# Altium PCB PCB1.PcbDoc
Units mm, origin at the board's own origin, x right, y up, seen from the top; angles counter-clockwise.
Board outline 50.04 x 29.34 mm, 2 copper layers (Top Layer, Bottom Layer); 15 components, 14 nets, 73 pads, 4 vias.
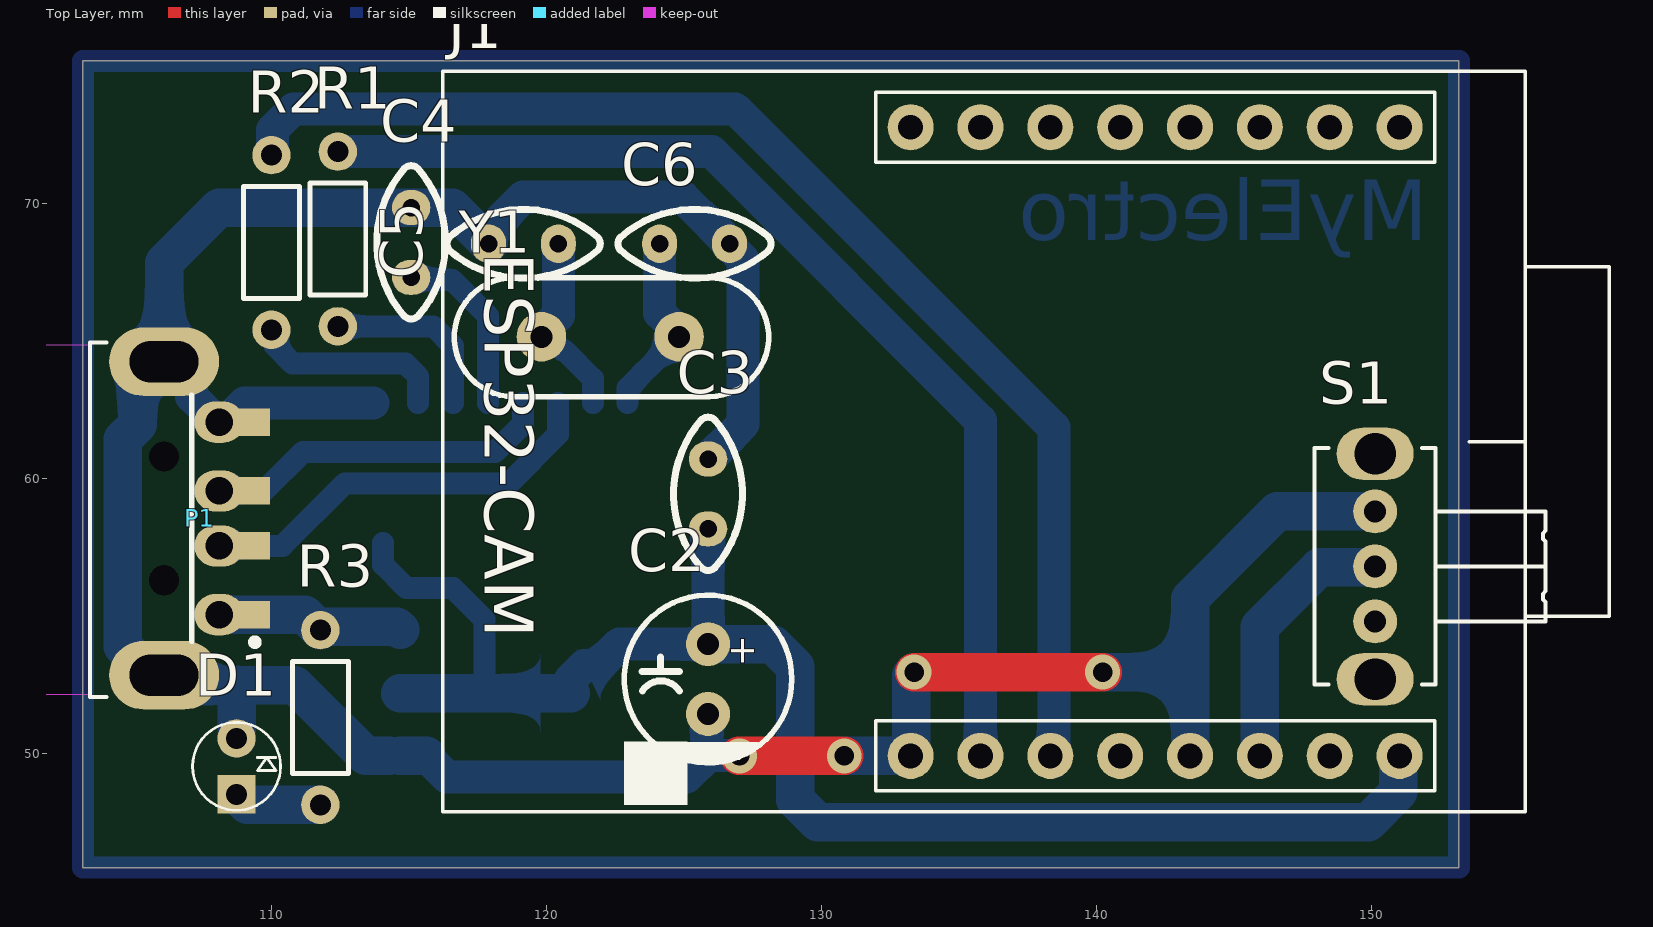
[diagram p0: Top Layer view]
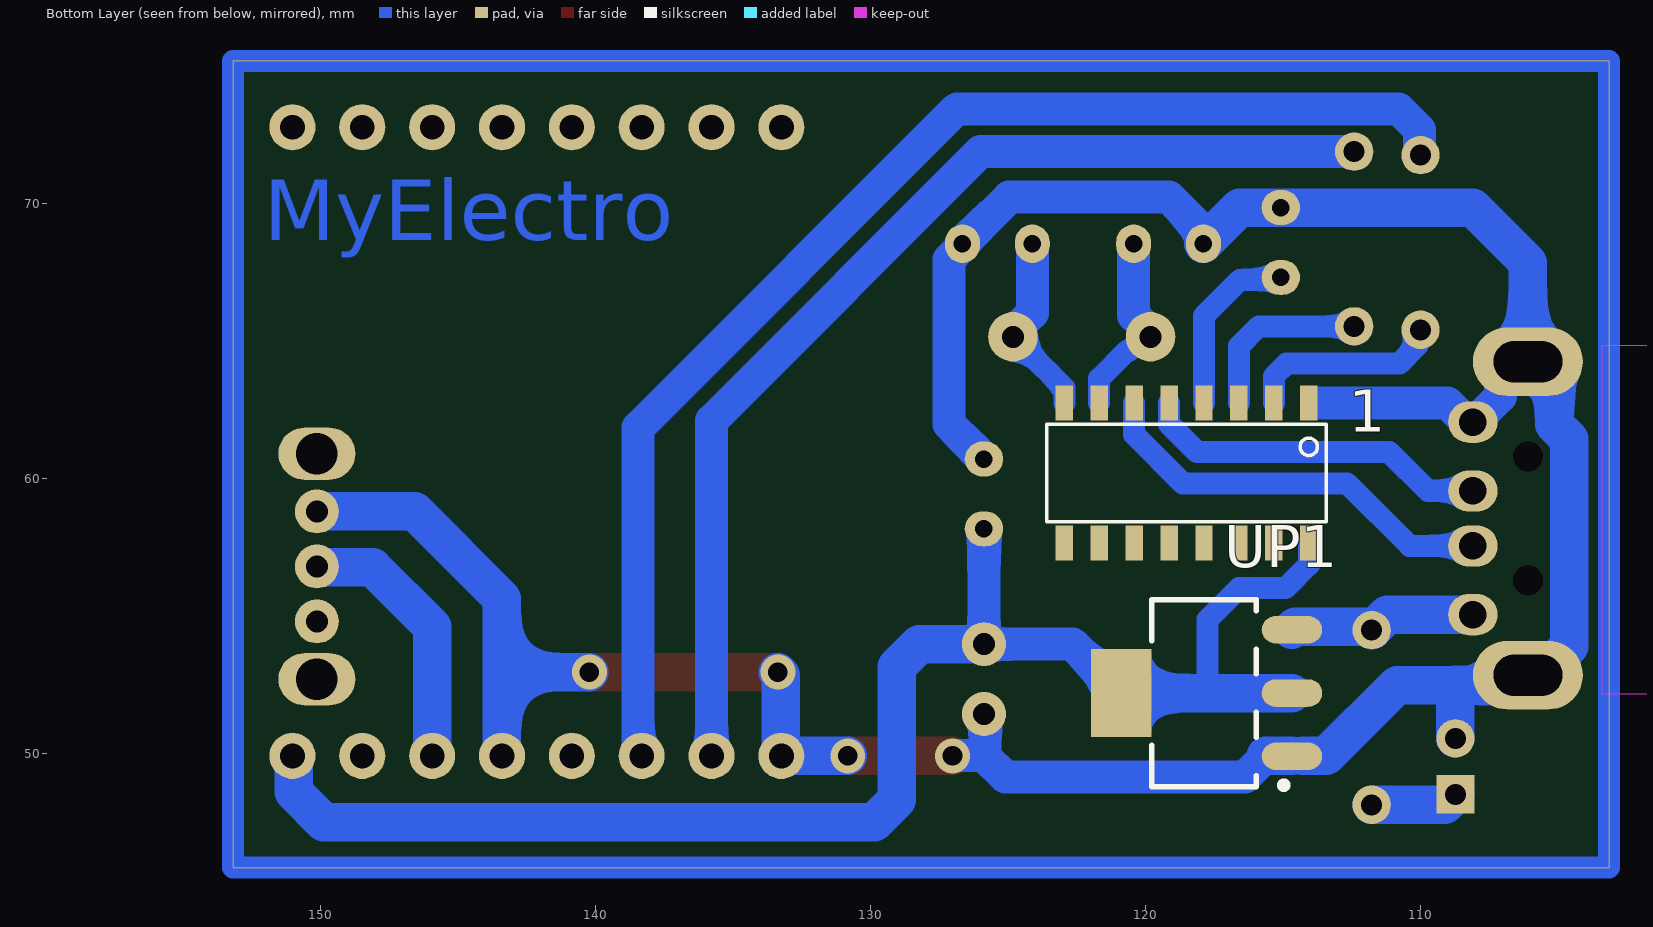
[diagram p1: Bottom Layer view, seen from below]
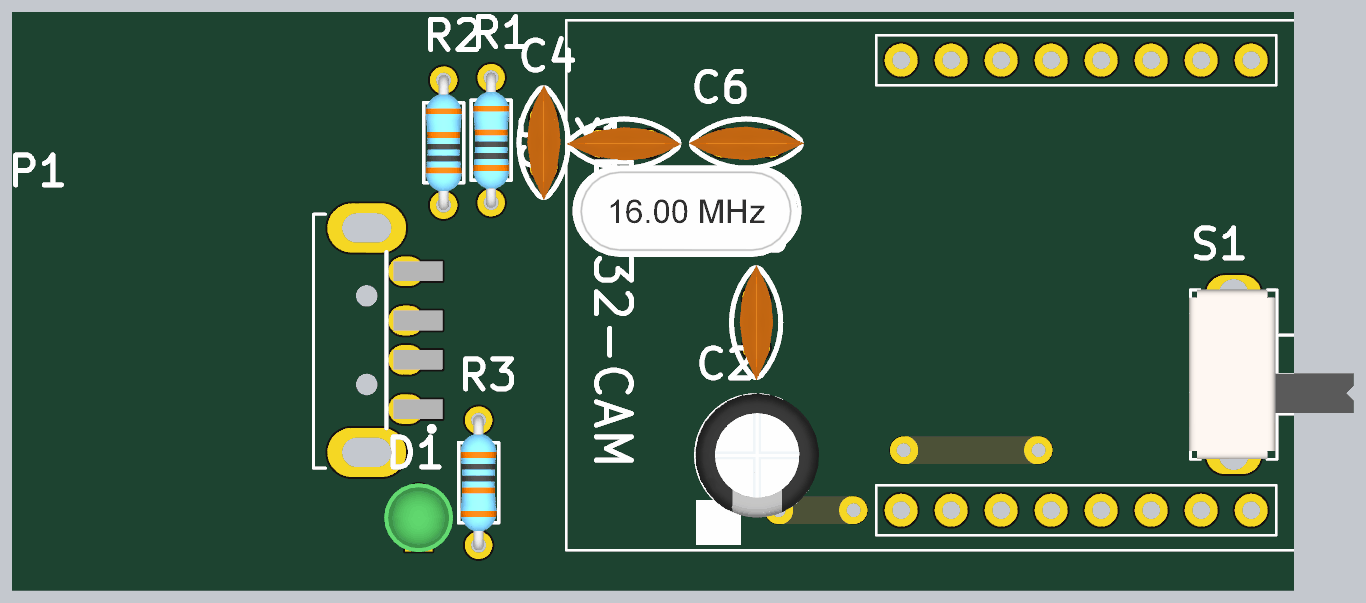
[diagram p2: 3D render of the assembled board from above, using the file's embedded part models]

## Layer stack, top to bottom
Top Solder: solder mask 0.0102, Solder Resist, Dk 3.5
Top Layer: signal copper 0.0356
Dielectric 1: dielectric 0.32, FR-4, Dk 4.8
Bottom Layer: signal copper 0.0356
Bottom Solder: solder mask 0.0102, Solder Resist, Dk 3.5

## Board outline
103.124,45.847 103.124,75.184 153.162,75.184 153.162,45.847

## Design rules (kind name [scope] priority, off if disabled: settings)
Clearance [All] p1: gap=0.254 ignorepadtopadclearanceinfootprint=FALSE except(0: Arc-Hole Track-Hole SMDPad-Hole THPad-Hole Via-Hole Fill-Hole Poly-Hole Region-Hole Text-Hole)
PolygonConnect [All] p1: connectstyle=Relief reliefconductorwidth=0.254 reliefentries=4 polygonreliefangle="90 Angle" airgapwidth=0.254
RoutingVias [All] p1: holewidth=0.711 width=1.27 viastyle="Through Hole" minholewidth=0.711 minwidth=1.27 maxholewidth=0.711 maxwidth=1.27
SolderMaskExpansion [All] p1: expansion=0.102 istentingtop=FALSE
Width [All] p1: maxlimit=1.4 minlimit=0.8 preferedwidth=1.2
30 further rules are at their usual default settings.

## Components (designator, comment, footprint, x,y, rotation, side; value= is the part's Value field where it differs from the comment)
1 "CH340" SOIC16 117.856,60.198 r270 bottom
C2 "100uf" "Cap electrolitic radial 6.3x12-2.5" 125.857,53.975 r270 top value=1uF
C3 "47nF" Cap-100nF 125.857,59.436 r90 top
C4 "100nF" Cap-100nF 115.062,68.58 r90 top
C5 "22pF" Cap-100nF 119.146,68.534 r0 top
C6 "22pF" Cap-100nF 125.369,68.534 r180 top
D1 "LED3MM" LED3mm_GRN 108.712,49.53 r90 top
J1 "ESP32-CAM" ESP32-CAM 116.205,74.93 r270 top
P1 "USB Connector" "USB A TYPE Right Angle" 103.378,58.547 r180 top
R1 "1K" RES-(1/4) 112.395,68.707 r90 top
R2 "1K" RES-(1/4) 109.982,68.58 r90 top
R3 "1K" RES-(1/4) 111.76,51.308 r270 top
S1 "Switch SPDT_Subminiator" "SPDT Subminiator" 150.114,56.801 r270 top
UP1 "3V3" SOT223 117.856,52.197 r0 bottom
Y1 "12 MHz" "XTAL 16MHZ" 122.301,65.151 r0 top

## Footprints (in the part's own frame and the unit in brackets; to place one, negate y for a bottom-side part, rotate by r counter-clockwise, add the part's x,y. Pads: shape width x height; smd on the part's side, far side on the other; paste and mask are expansions set on the pad)
"Cap electrolitic radial 6.3x12-2.5" [mm] "Capacitor Electrolytic D=6.3 x H=12 - P=2.5 mm, Altium Compatible"
  round 1.6 hole 0.8: 1(0,0) 2(2.54,0)
  silkscreen extent -1.78,-3.04 4.32,3.05, body extent -1.87,-3.09 4.43,3.2, height 1.2
Cap-100nF [mil] "Bipolar Capacitor-Design:Ali Hafizi"
  oval 50x55 hole 25: 1(-50,0) 2(50,0)
  silkscreen extent -110,-49 110,49, body extent -115,-34 115,33, height 272
ESP32-CAM [mil]
  round 66 hole 35.43: 1(85,670) 2(85,770) 3(85,870) 4(85,970) 5(85,1070) 6(85,1170) 7(85,1270) 8(85,1370) 9(985,1370) 10(985,1270) 11(985,1170) 12(985,1070) 13(985,970) 14(985,870) 15(985,770) 16(985,670)
  silkscreen extent 5,0 1065,1670
LED3mm_GRN [mil]
  rect 55x55 hole 30: 1(-40,0)
  round 55 hole 30: 2(40,0)
  silkscreen extent -63,-63 63,63, body extent -69,-69 69,69, height 154
RES-(1/4) [mil]
  round 55 hole 30: 1(-125,0) 2(125,0)
  silkscreen extent -80,-40 80,40, body extent -135,-36 135,36, height 115
SOIC16 [mm]
  rect 1.27x0.635 smd: 1(-2.54,3.81) 2(-2.54,2.54) 3(-2.54,1.27) 4(-2.54,0) 5(-2.54,-1.27) 6(-2.54,-2.54) 7(-2.54,-3.81) 8(-2.54,-5.08) 9(2.54,-5.08) 10(2.54,-3.81) 11(2.54,-2.54) 12(2.54,-1.27) 13(2.54,0) 14(2.54,1.27) 15(2.54,2.54) 16(2.54,3.81)
  silkscreen extent -1.78,-5.71 1.78,4.44
SOT223 [mm] "SOT223, 4-Leads, Body 6.5x3.5mm, Pitch 2.30mm-Designer Abbas Basereh"
  oval 2.2x1 smd: 1(-3.2,2.3) 2(-3.2,0) 3(-3.2,-2.3)
  rect 2.2x3.2 smd: 4(3,0)
  Top Layer pour cut-out: -1.7,3.556 1.7,3.556 1.7,-3.556 -1.7,-3.556
  silkscreen extent -3.02,-3.4 1.9,3.47, body extent -3.5,-3.25 3.5,3.25, height 1.7
"SPDT Subminiator" [mm] "Subminiator SPDT switch"
  round 1.6 hole 0.8: 1(2,0) 2(0,0) 3(-2,0)
  oval 1.9x2.8 hole 1.5: M2(-4.1,0) M2(4.1,0)
  silkscreen extent -4.3,-2.2 4.3,6.2, body extent -4.31,-2.28 4.3,6.09, height 4.7
"USB A TYPE Right Angle" [mm] "Connector; USB1.1, Type A, SM; 4 Position; Right Angle DESIGNER ABBAS BASEREH"
  rect 2.5x1 smd: 1(-5.3,3.5) 2(-5.3,1) 3(-5.3,-1) 4(-5.3,-3.5)
  oval 1.8x1.5 hole 1: 1(-4.7,3.5) 2(-4.7,1) 3(-4.7,-1) 4(-4.7,-3.5)
  oval 4x2.5 hole 1.5 slot 2.5 at 0 deg: 4(-2.7,5.7) 4(-2.7,-5.7)
  round 0.8 hole 1.1 unplated: MH1(-2.7,-2.25) MH2(-2.7,2.25)
  Keep-Out Layer board cut-out: 0,6.4 0,-6.3 15.3,-6.3 15.3,6.4
  silkscreen extent -6.13,-6.4 0,6.5, body extent -4.9,-6.3 15.1,6.3, height 3.45
"XTAL 16MHZ" [mm] "Crystal Oscillator"
  round 1.8 hole 0.8: 1(-2.5,0) 2(2.5,0)
  silkscreen extent -5.67,-2.18 5.76,2.15, body extent -5.68,-2.38 5.67,2.27, height 0.99

## Part data
1: "Circuit Breaker Magnetic 3Pole 40A 240VAC", Package=None, Availability=Unavailable, MF=Eaton, MP=CH340, Price=None, SnapEDA_Link=https://www.snapeda.com/parts/CH340/Eaton/view-part/4701946/?ref=snap
C2: library part "Cap ELECTROLITIC TOTAL SIZE", "Cap electrolitic radial", Data=16-12-2016, Designer="Abbas Basereh"
C3 C4 C5 C6: library part "CAP CERAMIC TOTAL SIZE", "CAP Ceramic Total", Designer="Ali Hafizi"
D1: library part "LED 3MM", "Light Emitting Diode", Designer="Ali Hafizi"
J1: "The smallest 802.11b/g/n Wi-Fi BT SoC Module", Package=Package, Availability=Unavailable, Check_prices=https://www.snapeda.com/parts/ESP32-CAM/AI-Thinker/view-part/5507632/?ref=eda, MF=AI-Thinker, MP=ESP32-CAM, Price=None, SnapEDA_Link=https://www.snapeda.com/parts/ESP32-CAM/AI-Thinker/view-part/5507632/?ref=snap
P1: library part "USB A-Type", "USB Connector-A Type"
R1 R2 R3: library part "RES DIP PACKAGE", "TOTAL DIP RESISTOR PACK", Designer="Ali Hafizi"
S1: "Subminiator SPDT Switch", Company=E.P.I.L, Design date=2011/11/02
UP1: library part AMS1117-x.x, "x.x Volt, 800mA Low-Dropout Linear Regulator, 4-pin SOT-223", Data=16-12-2016, Designer="Ali Hafizi"
Y1: library part XTAL, "XTAL Crystal", ComponentLink1Description=Datasheet, ComponentLink2Description=Reference, Design date=2017-1-3, Designer="ABBAS BASEREH", Mounting Technology="Surface Mount\Through-Hole", Status=Unreleased

## Via types
v1: diameter 1.27, hole 0.711, Top Layer to Bottom Layer, 4 vias

## Nets (pads, with @x,y where several pads share a name; then routed paths per layer and width w, separated by ;. In a path a pad name is that pad's centre, name@x,y a point inside that pad or via, vN(x,y) a via of type N, cw(c..) or ccw(c..) an arc to the next point about the centre after c; other vN are vias at no path point)
3.3: 1.16 C2.1 C3.1 J1.9 UP1.2 UP1.4 | length 56.9
  Bottom Layer w0.8: 1.16 114.046,56.857 114.896,56.007 116.586,56.007 117.729,54.864 117.729,52.451 117.475,52.197
  Bottom Layer w1.2: UP1.4 120.856,52.697 121.356,53.197 121.856,53.197 122.634,53.975 C2.1 C3.1
  Bottom Layer w1.4: UP1.2 117.475,52.197 UP1.4 ; C2.1 128.212,53.975 129.032,53.155 129.032,48.318 129.852,47.498 149.86,47.498 150.96,48.598 150.96,49.868 J1.9
+5: P1.1 R3.1 UP1.3 | length 6.9
  Bottom Layer w1.4: P1.1@108.078,55.047 108.274,55.047 111.196,55.047 R3.1 111.887,54.61 114.543,54.61 UP1.3
GND: 1.1 C2.2 C3.2 C4.2 C5.1 C6.1 D1.2 J1.12 J1.16 P1.4 S1.3 UP1.1 | length 118.2
  Top Layer w1.4: v1(127,49.911) v1(130.81,49.911) ; v1(133.35,52.959) v1(140.208,52.959)
  Bottom Layer w1.2: P1.4@106.078,64.247 106.476,64.247 107.077,63.646 107.077,62.979 108.009,62.047 108.078,62.047 108.309,62.047 109,62.738 113.665,62.738 ; UP1.1 115.612,49.897 116.36,49.149 125.082,49.149 125.857,49.924 ; C5.1 117.889,68.548 117.889,68.994 119.126,70.231 124.942,70.231 126.562,68.611 126.606,68.611 126.639,68.579 126.639,68.452 127.127,67.963 127.127,61.976 125.934,60.783 125.934,60.738 125.902,60.706 C3.2 ; C2.2 125.812,51.39 125.812,49.97 125.857,49.924 ; v1(127,49.911) 126.987,49.924 125.857,49.924
  Bottom Layer w1.4: D1.2 108.712,52.361 108.839,52.488 ; UP1.1@114.256,49.911 113.411,49.911 110.834,52.488 108.839,52.488 ; UP1.1@114.656,49.911 UP1.1@115.612,49.911 ; C5.1 116.56,69.85 C4.2 108.077,69.85 106.078,67.851 106.078,64.247 105.626,64.247 105.118,63.739 105.118,61.964 104.574,61.42 104.574,53.899 105.626,52.847 106.078,52.847 106.288,52.637 107.816,52.637 107.965,52.488 108.839,52.488 ; v1(130.81,49.911) J1.16 133.24,49.928 133.24,52.849 v1(133.35,52.959) ; v1(140.208,52.959) 143.383,52.959 ; J1.12 143.383,52.959 ; S1.3 146.558,58.801 143.383,55.626 143.383,52.959
Net1_2: 1.2 R2.1 | length 7.3
  Bottom Layer w0.8: R2.1 110.096,65.291 110.096,64.832 110.749,64.179 114.847,64.179 115.316,63.711 1.2
Net1_3: 1.3 R1.1 | length 6.6
  Bottom Layer w0.8: R1.1 115.863,65.532 116.586,64.809 1.3
Net1_4: 1.4 C4.1 | length 6.5
  Bottom Layer w0.8: C4.1 115.152,67.22 116.549,67.22 117.856,65.913 1.4
Net1_5: 1.5 P1.3 | length 12.8
  Bottom Layer w0.8: P1.3@108.078,59.547 109.712,59.547 111.125,60.96 118.11,60.96 119.126,61.976 1.5
Net1_6: 1.6 P1.2 | length 15.1
  Bottom Layer w0.8: P1.2@108.078,57.547 110.379,57.547 112.649,59.817 118.618,59.817 120.396,61.595 1.6
Net1_7: 1.7 C5.2 Y1.1 | length 7
  Bottom Layer w0.8: Y1.1 120.072,65.151 120.572,64.651 120.642,64.651 121.666,63.627 1.7
  Bottom Layer w1.2: Y1.1 119.801,65.313 120.416,65.928 C5.2
Net1_8: 1.8 C6.2 Y1.2 | length 6.9
  Bottom Layer w0.8: 1.8 122.936,63.286 Y1.2
  Bottom Layer w1.2: C6.2 124.099,66.016 124.801,65.313 Y1.2
NetD1_1: D1.1 R3.2 | length 3.2
  Bottom Layer w1.4: D1.1 109.093,48.133 R3.2
NetJ1_11: J1.11 S1.2 | length 9.8
  Bottom Layer w1.4: J1.11 145.923,54.61 148.076,56.763 150.076,56.763 S1.2
NetJ1_14: J1.14 R2.2 | length 46.6
  Bottom Layer w1.2: R2.2 110.02,71.793 110.02,72.671 110.783,73.435 126.845,73.435 138.43,61.849 138.43,50.375 138.394,50.339 J1.14@138.394,49.691
NetJ1_15: J1.15 R1.2 | length 39.8
  Bottom Layer w1.2: R1.2 125.984,71.882 135.763,62.103 J1.15@135.763,49.749
pads on no net: 1.9 1.10 1.11 1.12 1.13 1.14 1.15 J1.1 J1.2 J1.3 J1.4 J1.5 J1.6 J1.7 J1.8 J1.10 J1.13 P1.MH1 P1.MH2 S1.1 S1.M2
copper on no net: | length 158.8
  Bottom Layer w0.8: 103.124,45.847 103.124,75.184 153.162,75.184 153.162,45.847 103.124,45.847

## Other copper
Bottom Layer:
  text "MyElectro" at 152.05,68.67 h2.2

## Text inside footprints (layer, text, board x,y; h text height)
C2: Top Overlay "+" at 126.697,54.295 h1 r270
P1: Mechanical 1 "PCB Edge" at 102.905,63.72 h0.25 r270